# Altium PCB PCB.PcbDoc
Units mm, origin at the board's own origin, x right, y up, seen from the top; angles counter-clockwise.
Board outline 27.94 x 25.4 mm, 2 copper layers (Top Layer, Bottom Layer), stack 1.571 mm thick; 10 components, 18 nets, 92 pads, 0 vias.
Unrouted connection lines stored in the file: 40.
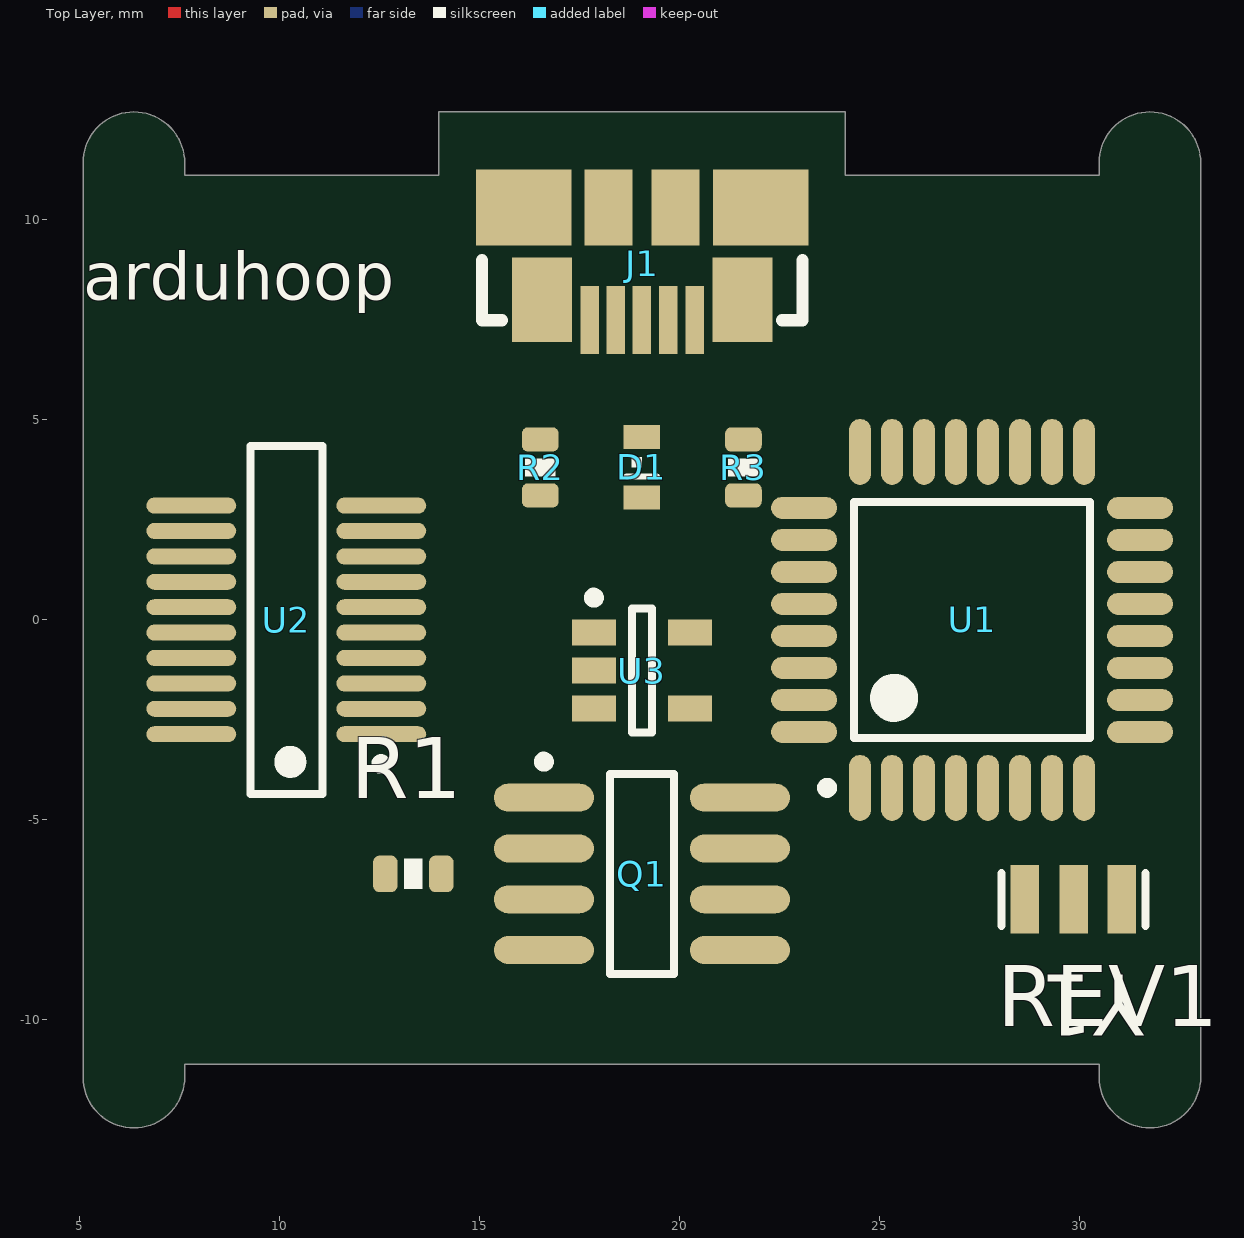
[diagram p0: Top Layer view]
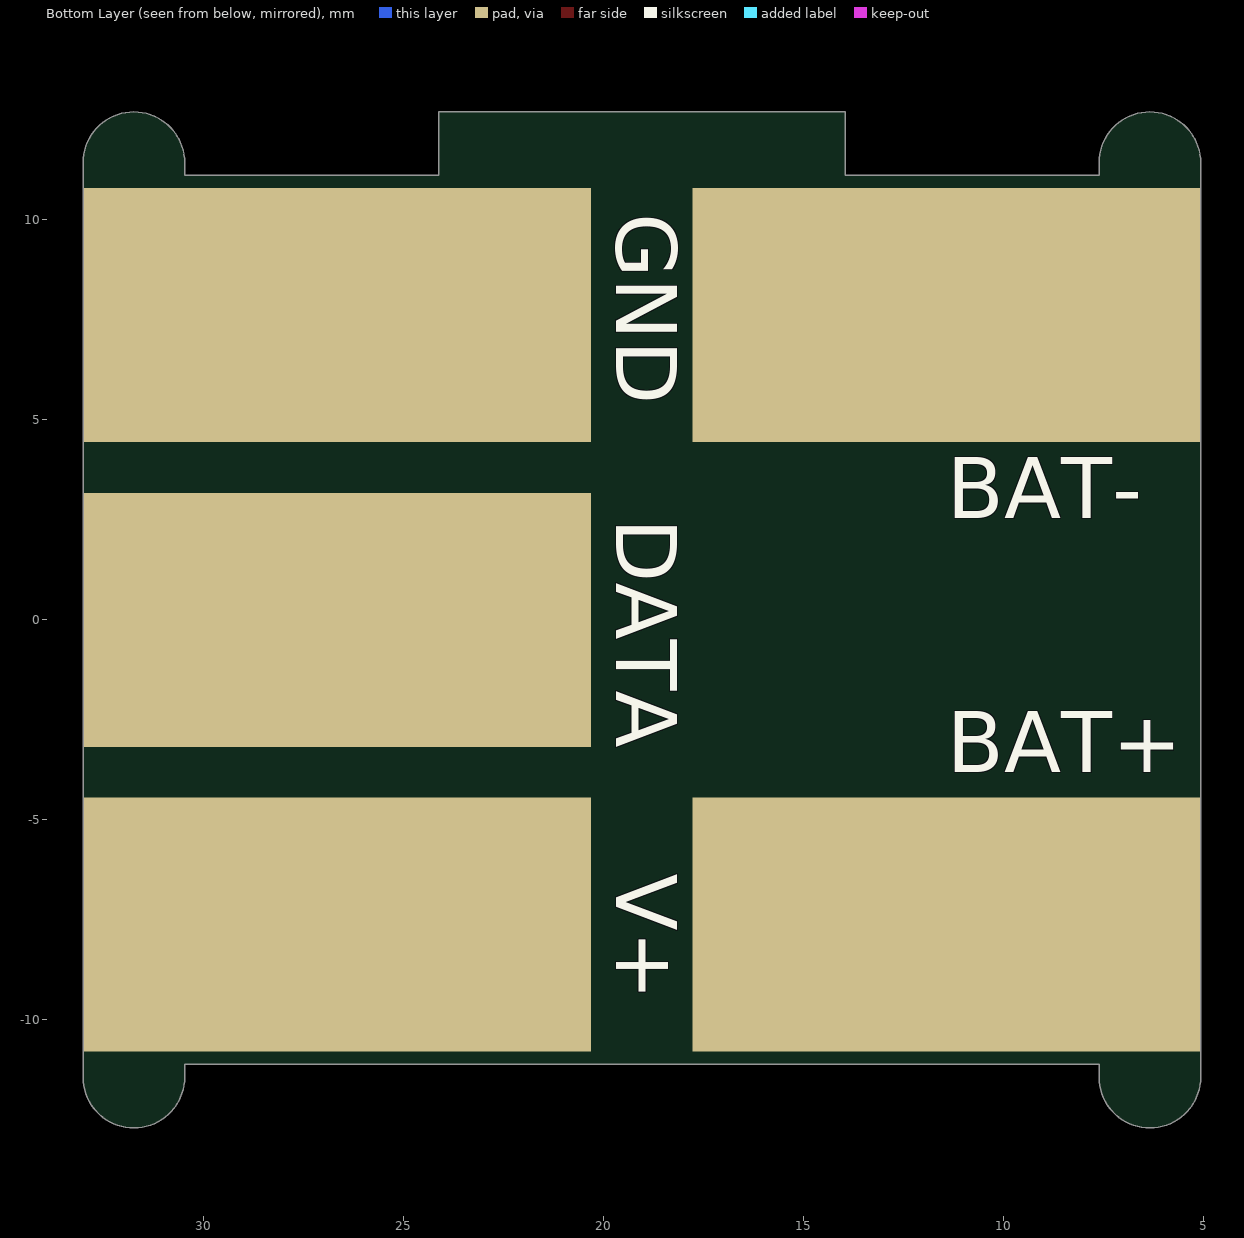
[diagram p1: Bottom Layer view, seen from below]

## Layer stack, top to bottom
Top Solder: solder mask 0.0102, Solder Resist, Dk 3.5
Top Layer: signal copper 0.0356
Dielectric 1: core 1.5, FR-4, Dk 4.2
Bottom Layer: signal copper 0.0356
Bottom Solder: solder mask 0.0102, Solder Resist, Dk 3.5

## Board outline
5.08,-11.43 ccw(c6.35,-11.43) 6.35,-12.7 ccw(c6.35,-11.43) 7.62,-11.43 7.62,-11.112 30.48,-11.112 30.48,-11.43 ccw(c31.75,-11.43) 31.75,-12.7 ccw(c31.75,-11.43) 33.02,-11.43 33.02,11.43 ccw(c31.75,11.43) 31.75,12.7 ccw(c31.75,11.43) 30.48,11.43 30.48,11.112 24.13,11.112 24.13,12.7 13.97,12.7 13.97,11.112 7.62,11.112 7.62,11.43 ccw(c6.35,11.43) 6.35,12.7 ccw(c6.35,11.43) 5.08,11.43

## Design rules (kind name [scope] priority, off if disabled: settings)
Clearance [All] p1: gap=0.191
PolygonConnect [All] p1: connectstyle=Relief reliefconductorwidth=0.254 reliefentries=4 polygonreliefangle="90 Angle" airgapwidth=0.254
RoutingVias [All] p1: holewidth=0.711 width=1.27 viastyle="Through Hole" minholewidth=0.711 minwidth=1.27 maxholewidth=0.711 maxwidth=1.27
SolderMaskExpansion [All] p1: expansion=0.102
Width [All] p1: maxlimit=0.254 minlimit=0.254 preferedwidth=0.254
30 further rules are at their usual default settings.

## Components (designator, comment, footprint, x,y, rotation, side; value= is the part's Value field where it differs from the comment)
D1 "LED0603" LED0603 19.05,3.81 r90 top
J1 "Molex 47346-0001" "Molex 47346-0001" 19.05,10.312 r270 top
Q1 "IRF7822" SO-8_M 19.05,-6.35 r0 top
R1 "Resistor" R0603 13.335,-6.35 r0 top
R2 "Resistor" R0603 16.51,3.81 r270 top
R3 "Resistor" R0603 21.59,3.81 r270 top
U1 "ATmega328P-AU" 32A_N 27.305,0 r90 top
U2 "FT231XS-R" SSOP-20_N 10.16,0 r180 top
U3 "MCP73831T-2ATI/OT" SOT-23-OT5_N 19.05,-1.27 r0 top
Y1 "RESONATOR-WITH-CAPS" CERALOCK 29.845,-6.985 r180 top

## Footprints (in the part's own frame and the unit in brackets; to place one, negate y for a bottom-side part, rotate by r counter-clockwise, add the part's x,y. Pads: shape width x height; smd on the part's side, far side on the other; paste and mask are expansions set on the pad)
32A_N [mm] "Thin QFP, 32-Leads, Body 7x7mm, Pitch 0.8mm, IPC Medium Density"
  oval 1.65x0.55 smd: 1(-4.2,2.8) 2(-4.2,2) 3(-4.2,1.2) 4(-4.2,0.4) 5(-4.2,-0.4) 6(-4.2,-1.2) 7(-4.2,-2) 8(-4.2,-2.8) 17(4.2,-2.8) 18(4.2,-2) 19(4.2,-1.2) 20(4.2,-0.4) 21(4.2,0.4) 22(4.2,1.2) 23(4.2,2) 24(4.2,2.8)
  oval 0.55x1.65 smd: 9(-2.8,-4.2) 10(-2,-4.2) 11(-1.2,-4.2) 12(-0.4,-4.2) 13(0.4,-4.2) 14(1.2,-4.2) 15(2,-4.2) 16(2.8,-4.2) 25(2.8,4.2) 26(2,4.2) 27(1.2,4.2) 28(0.4,4.2) 29(-0.4,4.2) 30(-1.2,4.2) 31(-2,4.2) 32(-2.8,4.2)
  silkscreen extent -4.32,-2.95 2.95,3.75, body extent -3.5,-3.5 3.5,3.5, height 1.2
CERALOCK [mil]
  rect 28x67 smd: 1(-47.24,0) 2(0,0) 3(48,0)
  silkscreen extent -71,-26 71,26, body extent -61,-26 65,26, height 40
LED0603 [mil]
  rect 24x36 smd: A(30,0) C(-29.53,0)
  silkscreen extent -9,-15 10,15
"Molex 47346-0001" [mil]
  rect 67x18 smd: D+(111,0) D-(111,26) GND(111,-51.18) ID(111,-25.59) VBUS(111,52)
  rect 75x94 smd: GND1(0,117) GND4(0,-116.14)
  rect 83x59 smd: GND2(91,99) GND3(91,-98.43)
  rect 75x47 smd: GND5(0,-32.97) GND6(0,33)
  silkscreen extent 52,-157 111,158, body extent -94,-157 120,157, height 107
R0603 [mil]
  rrect50% 24x36 smd mask+0: 1(-27.56,0) 2(27.56,0)
  silkscreen extent -9,-15 9,15, body extent -31,-16 32,16, height 18
SO-8_M [mm] "SOIC, 8-Leads, Body 4.9x3.9mm, Pitch 1.27mm, IPC Low Density"
  oval 2.5x0.7 smd: 1(-2.45,1.905) 2(-2.45,0.635) 3(-2.45,-0.635) 4(-2.45,-1.905) 5(2.45,-1.905) 6(2.45,-0.635) 7(2.45,0.635) 8(2.45,1.905)
  silkscreen extent -2.57,-2.5 0.8,2.93, body extent -2,-2.5 2,2.5, height 1.75
SOT-23-OT5_N [mm] "SOT23, 5-Leads, Body 2.9x1.6mm, Pitch 0.95mm, Lead Span 2.7mm, IPC Medium Density"
  rect 1.1x0.65 smd: 1(-1.2,0.95) 2(-1.2,0) 3(-1.2,-0.95) 4(1.2,-0.95) 5(1.2,0.95)
  silkscreen extent -1.32,-1.55 0.25,1.95, body extent -0.9,-1.55 0.9,1.55, height 1.45
SSOP-20_N [mm] "SOP, 20-Leads, Body 8.6x3.9mm, Pitch 0.635mm, IPC Medium Density"
  oval 2.25x0.4 smd: 1(-2.375,2.857) 2(-2.375,2.222) 3(-2.375,1.587) 4(-2.375,0.952) 5(-2.375,0.317) 6(-2.375,-0.318) 7(-2.375,-0.953) 8(-2.375,-1.588) 9(-2.375,-2.223) 10(-2.375,-2.858) 11(2.375,-2.857) 12(2.375,-2.222) 13(2.375,-1.587) 14(2.375,-0.952) 15(2.375,-0.317) 16(2.375,0.318) 17(2.375,0.953) 18(2.375,1.588) 19(2.375,2.223) 20(2.375,2.858)
  silkscreen extent -2.5,-4.35 0.9,4.35, body extent -1.99,-4.37 1.99,4.37, height 1.76

## Part data
D1: library part LED
J1: library part USB
Q1: "HEXFET Power MOSFET"
U1: "8-bit AVR Microcontroller, 32KB Flash, 1KB EEPROM, 2KB SRAM, 32-pin TQFP, Industrial Grade (-40°C to 85°C)"
U2: "USB to Full-Handshake UART Interface Chip, UHCI/OHCI/EHCI Compatible, USB 2.0 Compatible, -40 to +85 degC, 20-Pin SSOP, Pb-Free, Tape and Reel"
U3: "Miniature Single-Cell, Fully Integrated Li-Ion, Li-Polymer Charge Management Controller, 4.2V, 5-Pin SOT-23, Industrial Temperature, Tape and Reel"
Y1: library part Q00001, "CER RESONATOR 16.0MHZ SMD"

## Free pads (board coordinates)
  rect 12.7x6.35 smd far side: 2(11.43,7.62) 3(26.67,-7.62) 3(26.67,0) 3(26.67,7.62) 4(11.43,-7.62)

## Nets (pads, with @x,y where several pads share a name; then routed paths per layer and width w, separated by ;. In a path a pad name is that pad's centre, name@x,y a point inside that pad or via, vN(x,y) a via of type N, cw(c..) or ccw(c..) an arc to the next point about the centre after c; other vN are vias at no path point)
BAT+: pad.3@26.67,-7.62 pad.4 R1.1 U1.4 U1.6 U1.18 U3.3
D_N: J1.D- U2.12
D_P: J1.D+ U2.11
DRT: U2.1
FT_RX: U1.31 U2.4
FT_TX: U1.30 U2.20
GND: J1.GND J1.GND1 J1.GND2 J1.GND3 J1.GND4 pad.2 pad.3@26.67,7.62 Q1.1 Q1.2 Q1.3 R3.2 U1.3 U1.5 U1.21 U2.6 U2.16 U3.2 Y1.2
LED_DATA: pad.3@26.67,0 U1.10
LED_POWER: Q1.4 U1.9
NetC3_1: U1.20
NetD1_C: D1.C R2.2
NetQ1_5: Q1.5 Q1.6 Q1.7 Q1.8
NetR2_1: R2.1 U3.1
NetR3_1: R3.1 U3.5
NetU1_7: U1.7 Y1.3
NetU1_8: U1.8 Y1.1
RESET: R1.2 U1.29
VBUS: D1.A J1.VBUS U3.4
pads on no net: J1.GND5 J1.GND6 J1.ID U1.1 U1.2 U1.11 U1.12 U1.13 U1.14 U1.15 U1.16 U1.17 U1.19 U1.22 U1.23 U1.24 U1.25 U1.26 U1.27 U1.28 U1.32 U2.2 U2.3 U2.5 U2.7 U2.8 U2.9 U2.10 U2.13 U2.14 U2.15 U2.17 U2.18 U2.19

## Silkscreen, mask and mechanical layers (free items; w line width, h text height)
Top Overlay:
  text "arduhoop" at 5.08,7.62 h2.03
  text "REV1" at 27.94,-10.16 h1.52
Bottom Overlay:
  text "GND" at 19.685,10.16 h1.52 r90
  text "BAT-" at 11.43,2.54 h1.52
  text "DATA" at 19.685,2.54 h1.52 r90
  text "BAT+" at 11.43,-3.81 h1.52
  text "V+" at 19.685,-6.35 h1.52 r90
Mechanical 1:
  lines w0.203: 5.08,-11.43 ccw(c6.35,-11.43) 6.35,-12.7 ccw(c6.35,-11.43) 7.62,-11.43 7.62,-11.112 30.48,-11.112 30.48,-11.43 ccw(c31.75,-11.43) 31.75,-12.7 ccw(c31.75,-11.43) 33.02,-11.43 33.02,-11.112 33.02,11.112 33.02,11.43 ccw(c31.75,11.43) 31.75,12.7 ccw(c31.75,11.43) 30.48,11.43 30.48,11.112 24.13,11.112 24.13,12.7 13.97,12.7 13.97,11.112 7.62,11.112 7.62,11.43 ccw(c6.35,11.43) 6.35,12.7 ccw(c6.35,11.43) 5.08,11.43 5.08,11.112 5.08,-11.112 5.08,-11.43
Mechanical 3:
  lines w0.1: -5.08,-12.7 55.88,-12.7 ; -5.08,-11.112 55.88,-11.112 ; -5.08,11.112 55.88,11.112 ; -5.08,12.7 55.88,12.7

## Dimensions
-5.08,-12.7 to -5.08,12.7 on Bottom Overlay
33.02,-11.112 to 5.08,-11.112 on Bottom Overlay
5.08,-11.43 to 24.13,11.112 on Mechanical 3
-5.08,12.7 to -5.08,-12.7 on Mechanical 3
-5.08,11.112 to -5.08,-11.112 on Mechanical 3
6.35,12.7 to 31.75,12.7 on Mechanical 3